# EAGLE board Camera_board (EAGLE 6.6.0)
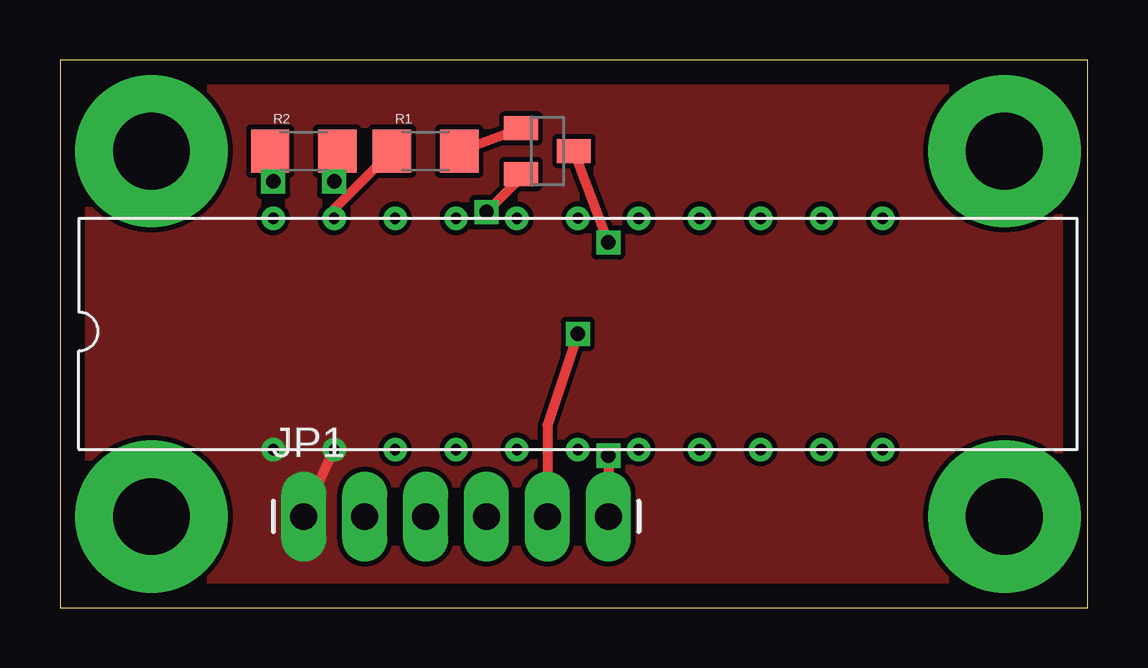
[diagram p0: board, top side]
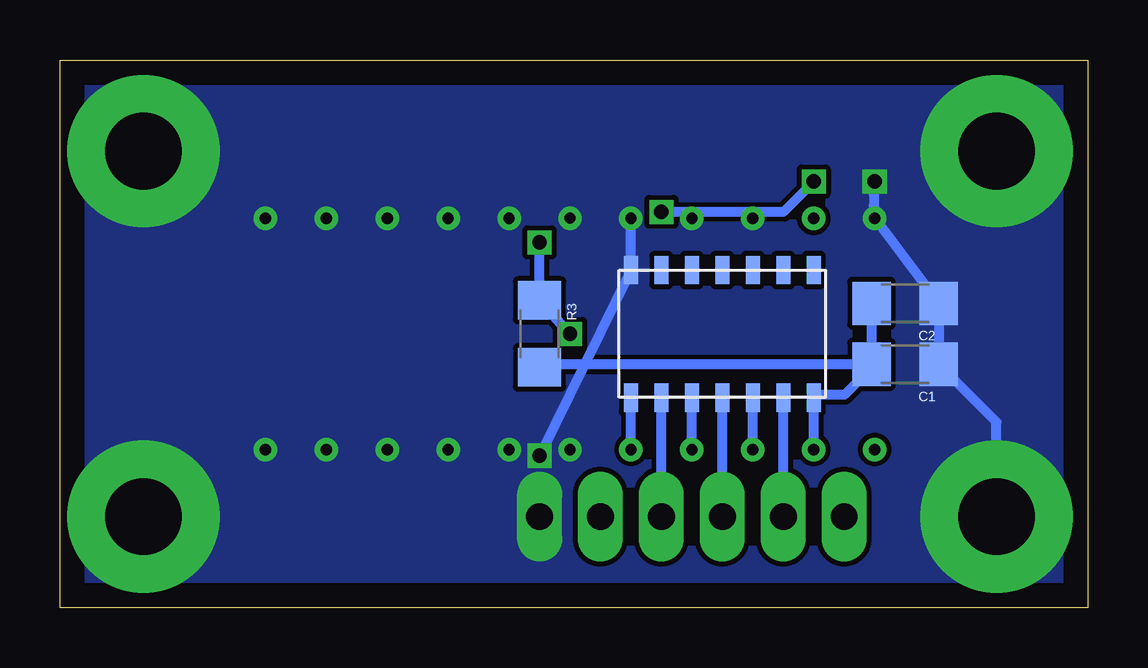
[diagram p1: board, bottom side, seen from below]

Size 42.85 x 22.85 mm. Coordinates in mm from the lower left corner, seen from the top.
Outline: 0,0 42.85,0 42.85,22.85 0,22.85 0,0
Copper layers (1*16): Top 0.035mm / dielectric 1.5mm / Bottom 0.035mm
Design rules "default": minimum track width 10mil, minimum drill 24mil, track to track 8mil, track to pad 8mil, pad to pad 8mil, via to via 8mil, smd to smd 8mil, copper to edge 40mil, drill to drill 8mil, minimum pad ring 10mil, minimum via ring 8mil, stop-mask expansion 4mil, vias tented up to drill 0mil, thermal gap 10mil

## Footprints (pad centres in the part's own frame; a part is rotated, then mirrored left to right if it is on the bottom)
1206 = smd 1.6 x 1.8: 1 -1.4,0; 2 1.4,0
1X06_LONGPADS = drill 1.118 pad 1.88 long: 1 0,0; 2 2.54,0; 3 5.08,0; 4 7.62,0; 5 10.16,0; 6 12.7,0
STANDOFF-ELECTRICAL = drill 3.2 pad 6.35: P1 0,0
SOT23-BEC = smd 1 x 1.4: B -0.95,-1.1; C 0,1.1; E 0.95,-1.1
CCDCAMERA = drill 0.47: ICG -7.62,-4.825; M -5.08,-4.825; NC 0,-4.825; NC1 2.54,-4.825; NC2 5.08,-4.825; NC3 7.62,-4.825; NC4 10.16,-4.825; NC5 12.7,-4.825; NC6 12.7,4.82; NC7 10.16,4.82; NC8 7.62,4.82; NC9 5.08,4.82; NC10 2.54,4.82; NC11 0,4.825; NC12 -2.54,4.82; NC13 -5.08,4.82; NC14 -7.62,4.82; OS -10.16,4.82; SH -2.54,-4.825; SS -12.7,4.82; VAD -10.16,-4.825; VDD -12.7,-4.825
CMOS_HEX_INVERTER = smd 1.18 x 0.58: A1 -2.66,3.81; A2 -2.66,1.27; A3 -2.66,-1.27; A4 2.66,-2.54; A5 2.66,0; A6 2.66,2.54; GND -2.66,-3.81; VDD 2.66,3.81; Y1 -2.66,2.54; Y2 -2.66,0; Y3 -2.66,-2.54; Y4 2.66,-3.81; Y5 2.66,-1.27; Y6 2.66,1.27

## Placement (x,y rotation side)
C1  0.1uF  [1206]  7.62,10.16 180 bottom
C2  10uF  [1206]  7.62,12.7 180 bottom
JP1  [1X06_LONGPADS]  10.16,3.81 0 top
R1  150  [1206]  15.24,19.05 0 top
R2  150  [1206]  10.16,19.05 0 top
R3  2.2k  [1206]  22.86,11.43 270 bottom
S1  STANDOFF_ELECTRICAL  [STANDOFF-ELECTRICAL]  39.37,3.81 0 top
S2  STANDOFF_ELECTRICAL  [STANDOFF-ELECTRICAL]  39.37,19.05 0 top
S3  STANDOFF_ELECTRICAL  [STANDOFF-ELECTRICAL]  3.81,19.05 0 top
S4  STANDOFF_ELECTRICAL  [STANDOFF-ELECTRICAL]  3.81,3.81 0 top
U$1  TRANSISTOR  [SOT23-BEC]  20.32,19.05 270 top
U$2  CCDCAMERA  [CCDCAMERA]  21.59,11.43 0 top
U$3  CMOS_HEX_INVERTER  [CMOS_HEX_INVERTER]  15.24,11.43 270 bottom

## Library data of the parts
C1 C2 = SparkFun-Capacitors
JP1 = SparkFun-Connectors
R1-R3 = SparkFun-Resistors
S1-S4 = SparkFun-Electromechanical
U$1 U$3 = SCIENCE_BOARD
U$2 = CCDCAMERA (1)

## Nets
B: R1.2 U$1.B
E: R2.2 U$1.E
GND: C1.1 C2.1 JP1.6 R2.1 S1.P1 S2.P1 S3.P1 S4.P1 U$2.NC U$2.NC1 U$2.NC2 U$2.NC3 U$2.NC4 U$2.NC5 U$2.NC6 U$2.NC7 U$2.NC8 U$2.NC9 U$2.NC10 U$2.NC11 U$2.NC12 U$2.NC13 U$2.NC14 U$2.SS U$3.GND
ICG_IN: JP1.2 U$3.A6
ICG_OUT: U$2.ICG U$3.Y6
M_IN: JP1.3 U$3.A5
M_OUT: U$2.M U$3.Y5
OS: R1.1 U$2.OS
OS_OUT: JP1.5 R3.1 U$1.C
SH_IN: JP1.4 U$3.A4
SH_OUT: U$2.SH U$3.Y4
VDD: C1.2 C2.2 JP1.1 R3.2 U$2.VAD U$2.VDD U$3.VDD

## Tracks (layer width: path | path; a pad name or v marks a point on that pad's centre or on a via)
B
  Top 0.406: R1.2 U$1.B
E  (via drill 0.6)
  Top 0.406: R2.2 11.43,18.92 v11.43,17.78 | v17.78,16.51 19.22,17.95 U$1.E
  Bottom 0.406: v11.43,17.78 12.7,16.51 v17.78,16.51
GND  (via drill 0.6)
  Top 0.406: R2.1 v8.89,17.78 | v22.86,6.35 JP1.6
  Bottom 0.406: v8.89,17.78 arc-12 U$2.SS C2.1 C1.1 3.81,7.75 S4.P1 | U$2.NC12 U$3.GND v22.86,6.35
  pour Bottom (no thermals): 0,24.13 44.45,24.13 44.45,-1.27 0,-1.27
ICG_IN
  Bottom 0.406: JP1.2 U$3.A6
ICG_OUT
  Bottom 0.406: U$2.ICG U$3.Y6
M_IN
  Bottom 0.406: JP1.3 U$3.A5
M_OUT
  Bottom 0.406: U$2.M U$3.Y5
OS
  Top 0.406: R1.1 11.43,16.64 U$2.OS
OS_OUT  (via drill 0.6)
  Top 0.406: v22.86,15.24 U$1.C | v21.59,11.43 20.32,7.62 JP1.5
  Bottom 0.406: v22.86,15.24 R3.1 v21.59,11.43
SH_IN
  Bottom 0.406: JP1.4 U$3.A4
SH_OUT
  Bottom 0.406: U$2.SH U$3.Y4
VDD
  Top 0.406: JP1.1 U$2.VAD
  Bottom 0.406: U$2.VAD U$3.VDD 11.31,8.89 10.16,8.89 9.02,10.03 C1.2 | C2.2 C1.2 | C1.2 22.86,10.16 R3.2
  pour Top (no thermals): -1.27,25.4 45.72,25.4 45.72,-2.54 -1.27,-2.54